# Altium PCB Stick.PcbDoc
Units mm, origin at the board's own origin, x right, y up, seen from the top; angles counter-clockwise.
Board outline 50 x 10 mm, 2 copper layers (Top Layer, Bottom Layer); 16 components, 11 nets, 54 pads, 18 vias.
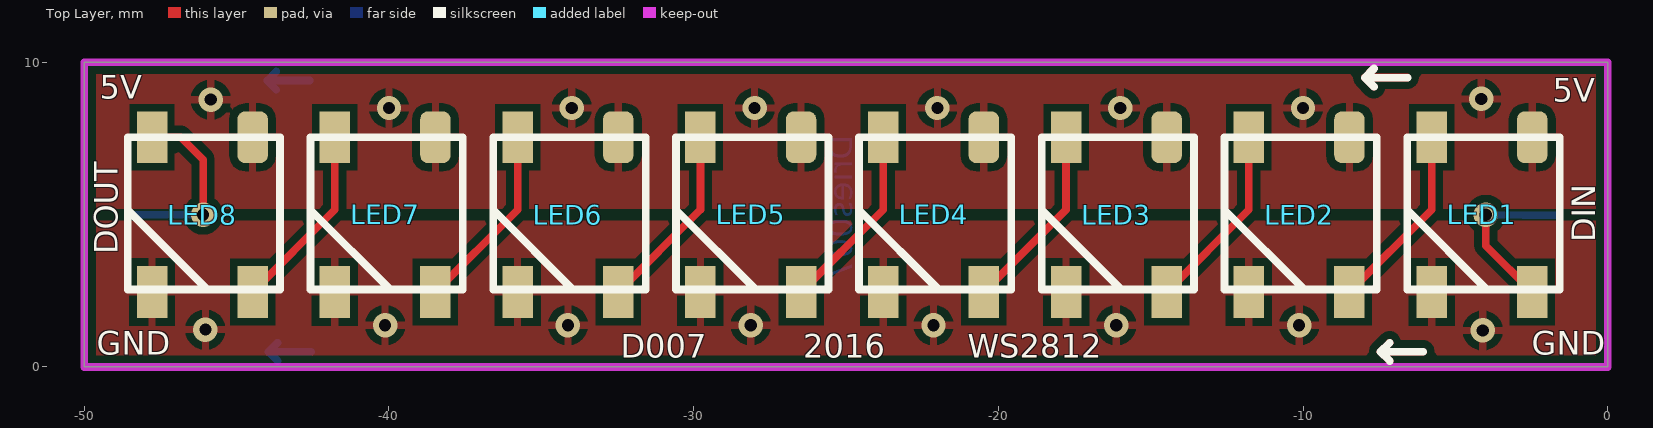
[diagram p0: Top Layer view]
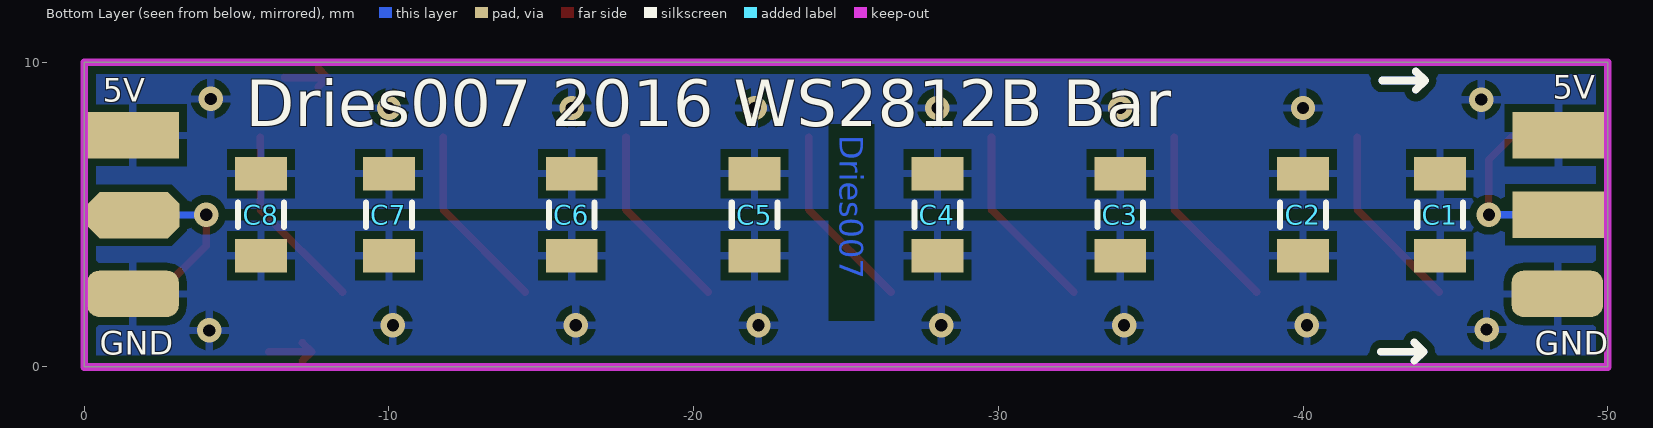
[diagram p1: Bottom Layer view, seen from below]

## Layer stack, top to bottom
Top Solder: solder mask 0.0102, Solder Resist, Dk 3.5
Top Layer: signal copper 0.0356
Dielectric 1: dielectric 0.32, FR-4, Dk 4.8
Bottom Layer: signal copper 0.0356
Bottom Solder: solder mask 0.0102, Solder Resist, Dk 3.5

## Board outline
-50,0 0,0 0,10 -50,10

## Design rules (kind name [scope] priority, off if disabled: settings)
Clearance [All] p1: gap=0.254
PolygonConnect [All] p1: connectstyle=Relief reliefconductorwidth=0.254 reliefentries=4 polygonreliefangle="90 Angle" airgapwidth=0.254
RoutingVias [All] p1: holewidth=0.711 width=1.27 viastyle="Through Hole" minholewidth=0.711 minwidth=1.27 maxholewidth=0.711 maxwidth=1.27
SolderMaskExpansion [All] p1: expansion=0.102
Width [All] p1: maxlimit=0.254 minlimit=0.254 preferedwidth=0.254
30 further rules are at their usual default settings.

## Components (designator, comment, footprint, x,y, rotation, side; value= is the part's Value field where it differs from the comment)
C1 "" C1206 -44.5,5 r90 bottom
C2 "" C1206 -40,5 r90 bottom
C3 "" C1206 -34,5 r90 bottom
C4 "" C1206 -28,5 r90 bottom
C5 "" C1206 -22,5 r90 bottom
C6 "" C1206 -16,5 r90 bottom
C7 "" C1206 -10,5 r90 bottom
C8 "" C1206 -5.8,5 r90 bottom
LED1 "WS2812B" WS2812B -4,5 r270 top
LED2 "WS2812B" WS2812B -10,5 r270 top
LED3 "WS2812B" WS2812B -16,5 r270 top
LED4 "WS2812B" WS2812B -22,5 r270 top
LED5 "WS2812B" WS2812B -28,5 r270 top
LED6 "WS2812B" WS2812B -34,5 r270 top
LED7 "WS2812B" WS2812B -40,5 r270 top
LED8 "WS2812B" WS2812B -46,5 r270 top

## Footprints (in the part's own frame and the unit in brackets; to place one, negate y for a bottom-side part, rotate by r counter-clockwise, add the part's x,y. Pads: shape width x height; smd on the part's side, far side on the other; paste and mask are expansions set on the pad)
C1206 [mm] "Chip Capacitor, Body 3.2x1.6mm, IPC High Density"
  rect 1.1x1.7 smd: 1(-1.35,0) 2(1.35,0)
  silkscreen extent -0.4,-0.75 0.4,0.75, body extent -1.7,-0.9 1.7,0.9, height 1.3
WS2812B [mm]
  rrect50% 1.7x1 smd: 1(-2.54,1.524)
  rect 1.7x1 smd: 2(-2.54,-1.778) 3(2.54,-1.778) 4(2.54,1.524)
  silkscreen extent -2.54,-2.58 2.46,2.42

## Part data
C1 C2 C3 C4 C5 C6 C7 C8: library part Cap, "Capacitor"

## Free pads (board coordinates)
  rrect50% 3x1.524 smd far side: 0(-48.35,2.4) 0(-1.6,2.4)
  rect 3x1.524 smd far side: 1(-48.375,5) 2(-48.375,7.6) 2(-1.6,7.6)
  oct 3x1.524 smd far side: 1(-1.625,4.975)

## Via types
v1: diameter 0.8, hole 0.4, Top Layer to Bottom Layer, tented both sides, 18 vias

## Nets (pads, with @x,y where several pads share a name; then routed paths per layer and width w, separated by ;. In a path a pad name is that pad's centre, name@x,y a point inside that pad or via, vN(x,y) a via of type N, cw(c..) or ccw(c..) an arc to the next point about the centre after c; other vN are vias at no path point)
DIN: LED1.4 pad.1@-1.625,4.975 | length 5.5
  Top Layer w0.254: v1(-4,5) -4,3.984 LED1.4
  Bottom Layer w0.254: v1(-4,5) pad.1@-1.625,4.975
DOUT: LED8.2 pad.1@-48.375,5 | length 6.1
  Top Layer w0.254: LED8.2 -46.84,7.54 -46.1,6.8 v1(-46.1,5)
  Bottom Layer w0.254: pad.1@-48.375,5 v1(-46.1,5)
GND: C1.1 C2.1 C3.1 C4.1 C5.1 C6.1 C7.1 C8.1 LED1.3 LED2.3 LED3.3 LED4.3 LED5.3 LED6.3 LED7.3 LED8.3 pad.0
  other v1: -4.1,1.2 -46.027,1.227 -40.127,1.373 -34.127,1.373 -28.127,1.373 -22.127,1.373 -16.127,1.373 -10.127,1.373
NetLED1_2: LED1.2 LED2.4 | length 6.2
  Top Layer w0.254: LED2.4 -5.778,5.158 LED1.2
NetLED2_2: LED2.2 LED3.4 | length 6.2
  Top Layer w0.254: LED3.4 -11.778,5.158 LED2.2
NetLED3_2: LED3.2 LED4.4 | length 6.2
  Top Layer w0.254: LED4.4 -17.778,5.158 LED3.2
NetLED4_2: LED4.2 LED5.4 | length 6.2
  Top Layer w0.254: LED5.4 -23.778,5.158 LED4.2
NetLED5_2: LED5.2 LED6.4 | length 6.2
  Top Layer w0.254: LED6.4 -29.778,5.158 LED5.2
NetLED6_2: LED6.2 LED7.4 | length 6.2
  Top Layer w0.254: LED7.4 -35.778,5.158 LED6.2
NetLED7_2: LED7.2 LED8.4 | length 6.2
  Top Layer w0.254: LED8.4 -41.778,5.158 LED7.2
VCC: C1.2 C2.2 C3.2 C4.2 C5.2 C6.2 C7.2 C8.2 LED1.1 LED2.1 LED3.1 LED4.1 LED5.1 LED6.1 LED7.1 LED8.1 pad.2
  other v1: -40,8.5 -34,8.5 -28,8.5 -22,8.5 -16,8.5 -10,8.5 -45.85,8.775 -4.15,8.8
copper on no net: | length 9
  Top Layer w0.254: -7.675,9.2 -7.975,9.5 ; -7.675,9.8 -7.975,9.5 ; -7.159,0.2 -7.459,0.5 ; -7.159,0.8 -7.459,0.5 ; -6.575,9.5 -7.975,9.5 ; -6.059,0.5 -7.459,0.5
  Bottom Layer w0.254: -43.7,9.1 -44,9.4 ; -43.7,9.7 -44,9.4 ; -43.659,0.2 -43.959,0.5 ; -43.659,0.8 -43.959,0.5 ; -42.6,9.4 -44,9.4 ; -42.559,0.5 -43.959,0.5

## Polygon pours and split planes (outlines as drawn)
VCC on Top Layer "Top Layer-VCC" (solid, remove dead copper, pour order 2): -50,5 -50,10 0,10 0,5
GND on Top Layer "Top Layer-GND" (solid, remove dead copper, pour order 0): -50,5 -50,0 0,0 0,5
GND on Bottom Layer "Bottom Layer-GND" (solid, remove dead copper, pour order 6): -50,0 -50,5 0,5 0,0
VCC on Bottom Layer "Bottom Layer-VCC" (solid, remove dead copper, pour order 4): -50,5 -50,10 0,10 0,5

## Keep-outs
Keep-Out Layer:
  the board outline again, w0.254

## Other copper
Top Layer:
  pour cut-out: -50,5.2 -50,4.8 0,4.8 0,5.2
Bottom Layer:
  pour cut-out: -50,5.2 -50,4.8 0,4.8 0,5.2
  text "Dries007" at -24.8,7.6 h0.76 r90

## Silkscreen, mask and mechanical layers (free items; w line width, h text height)
Top Overlay:
  lines w0.254: -7.671,9.197 -7.971,9.497 ; -7.671,9.797 -7.971,9.497 ; -7.155,0.199 -7.455,0.499 ; -7.155,0.799 -7.455,0.499 ; -6.571,9.497 -7.971,9.497 ; -6.055,0.499 -7.455,0.499
  text "5V" at -49.5,8.8 h0.76
  text "5V" at -1.8,8.7 h0.76
  text "DIN" at -0.4,4.1 h0.76 r90
  text "DOUT" at -48.9,3.7 h0.76 r90
  text "GND" at -49.6,0.4 h0.76
  text "GND" at -2.5,0.4 h0.76
  text "D007" at -32.4,0.3 h0.76
  text "2016" at -26.4,0.3 h0.76
  text "WS2812" at -21,0.3 h0.76
Bottom Overlay:
  lines w0.254: -43.704,9.103 -44.004,9.403 ; -43.704,9.703 -44.004,9.403 ; -43.654,0.202 -43.954,0.502 ; -43.654,0.802 -43.954,0.502 ; -42.604,9.403 -44.004,9.403 ; -42.554,0.502 -43.954,0.502
  text "5V" at -48.2,8.8 h0.76
  text "5V" at -0.6,8.7 h0.76
  text "Dries007 2016 WS2812B Bar" at -5.3,7.9 h1.52
  text "GND" at -47.6,0.4 h0.76
  text "GND" at -0.5,0.4 h0.76
Mechanical 1:
  the board outline again, w0.254